# Altium PCB PCB_RXV1.PcbDoc
Units mm, origin at the board's own origin, x right, y up, seen from the top; angles counter-clockwise.
Board outline 70 x 50 mm, 2 copper layers (Top Layer, Bottom Layer); 23 components, 21 nets, 109 pads, 6 vias.
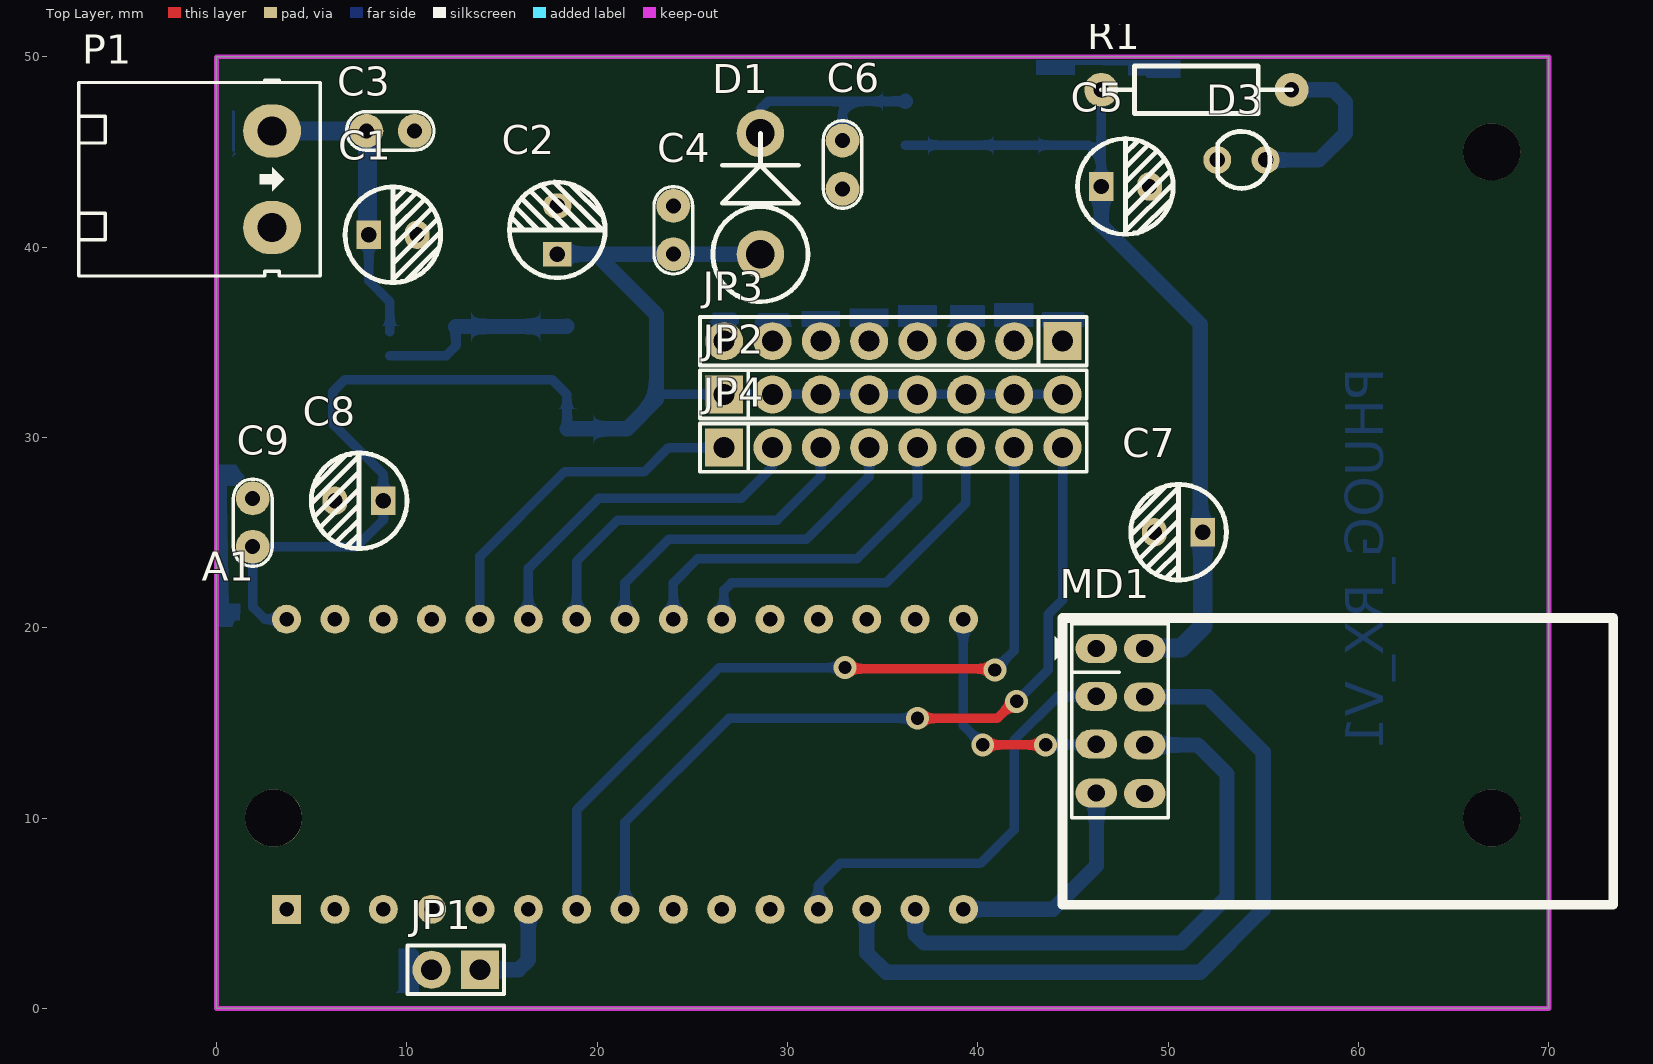
[diagram p0: Top Layer view]
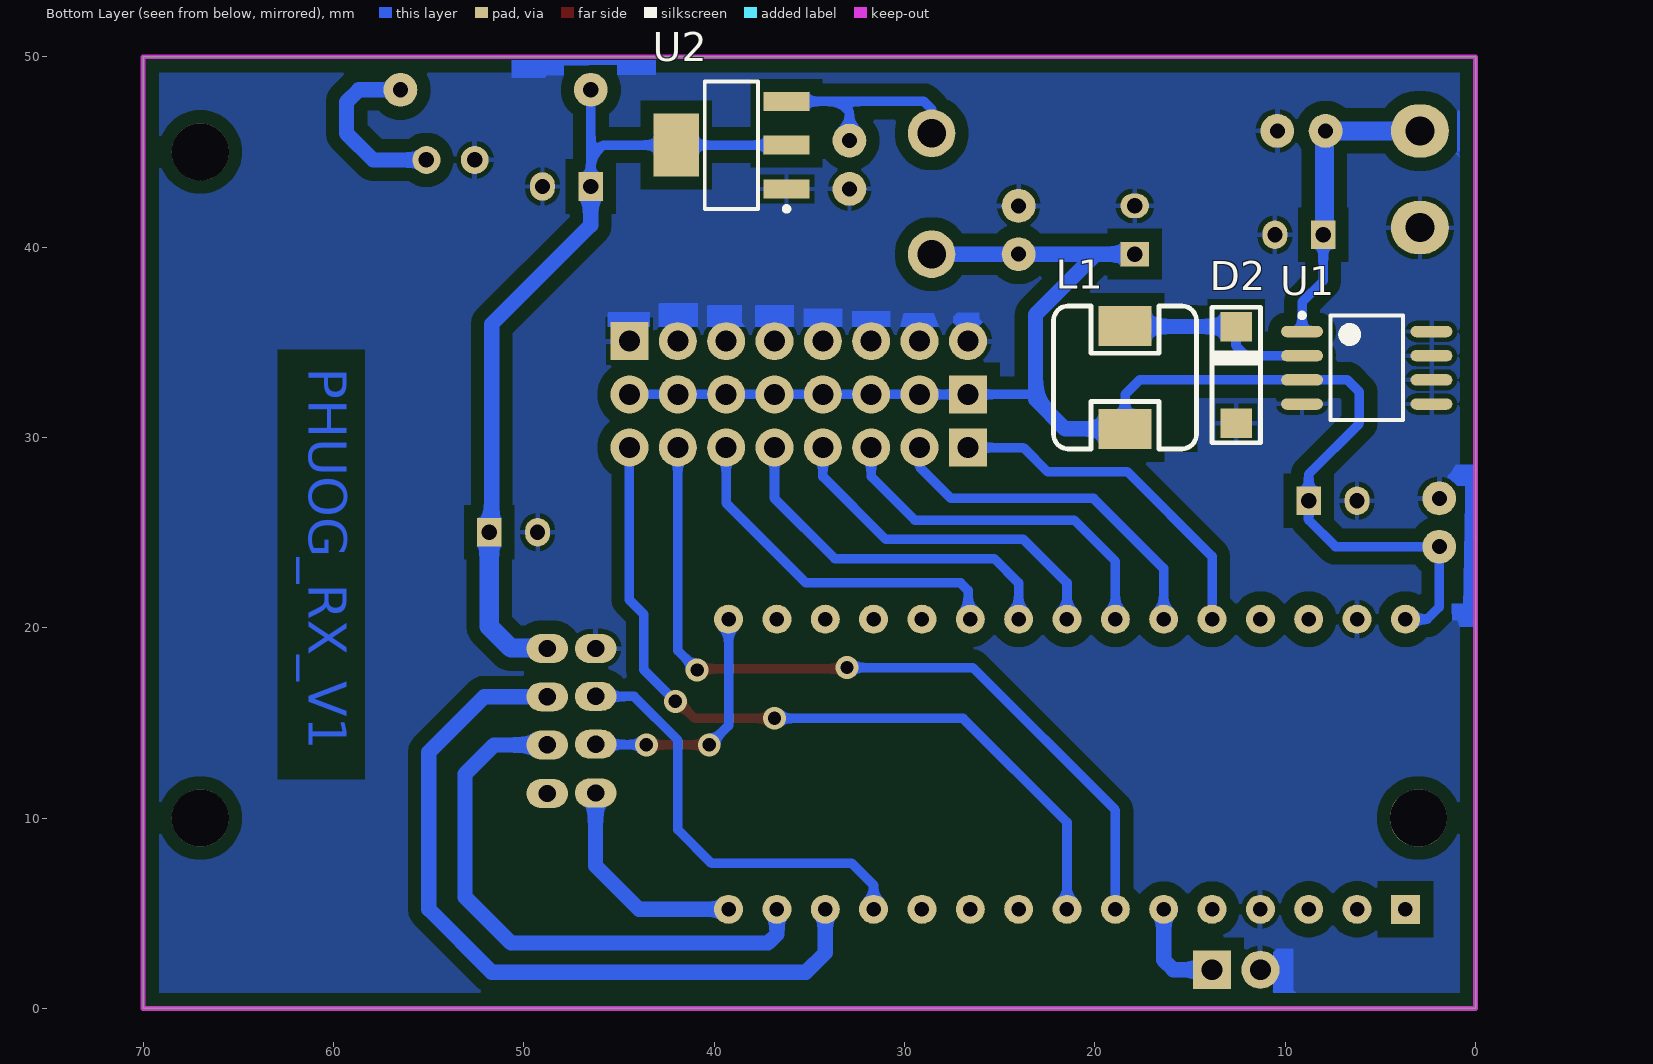
[diagram p1: Bottom Layer view, seen from below]
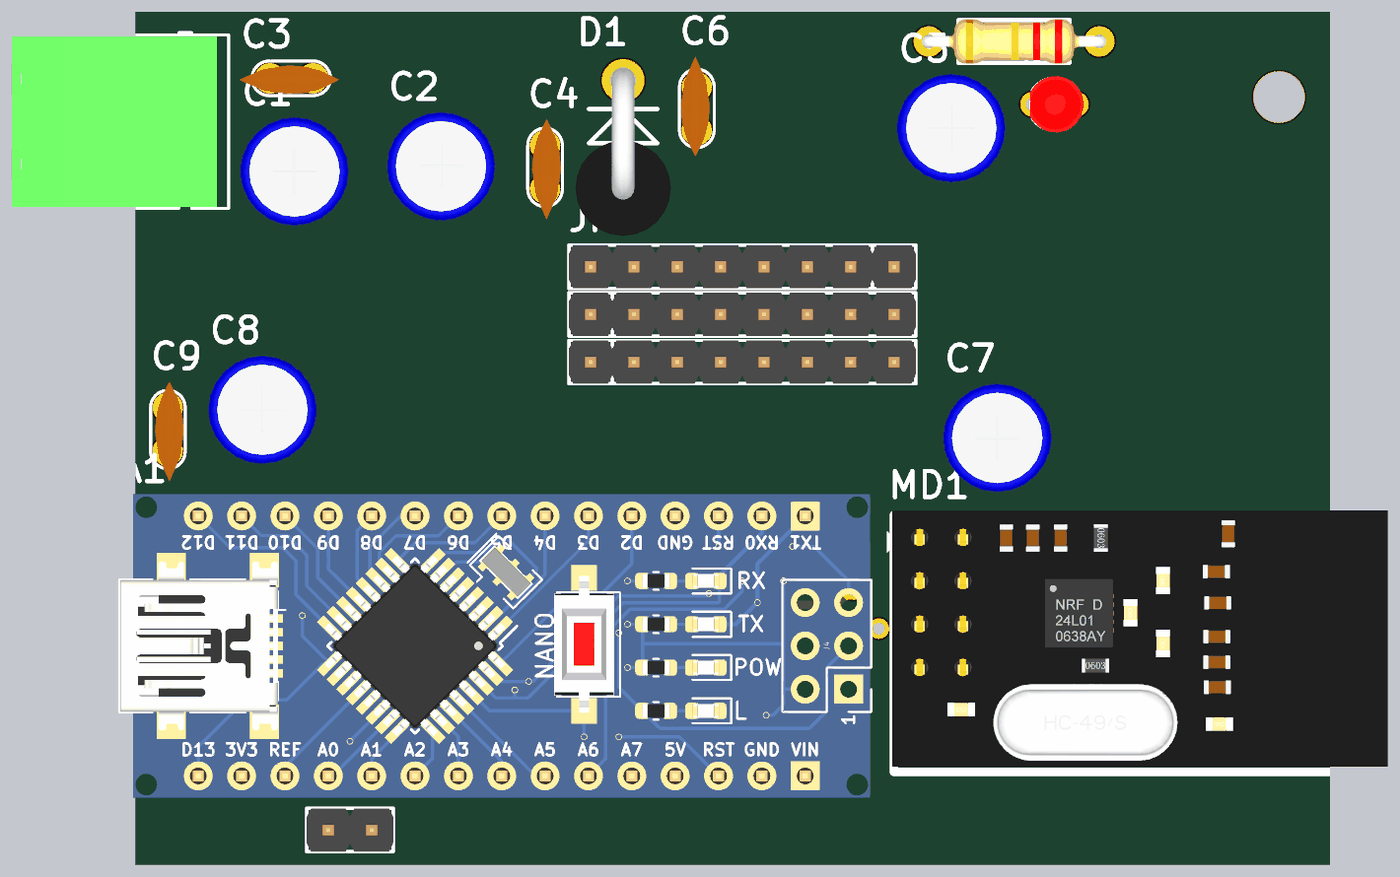
[diagram p2: 3D render of the assembled board from above, using the file's embedded part models]
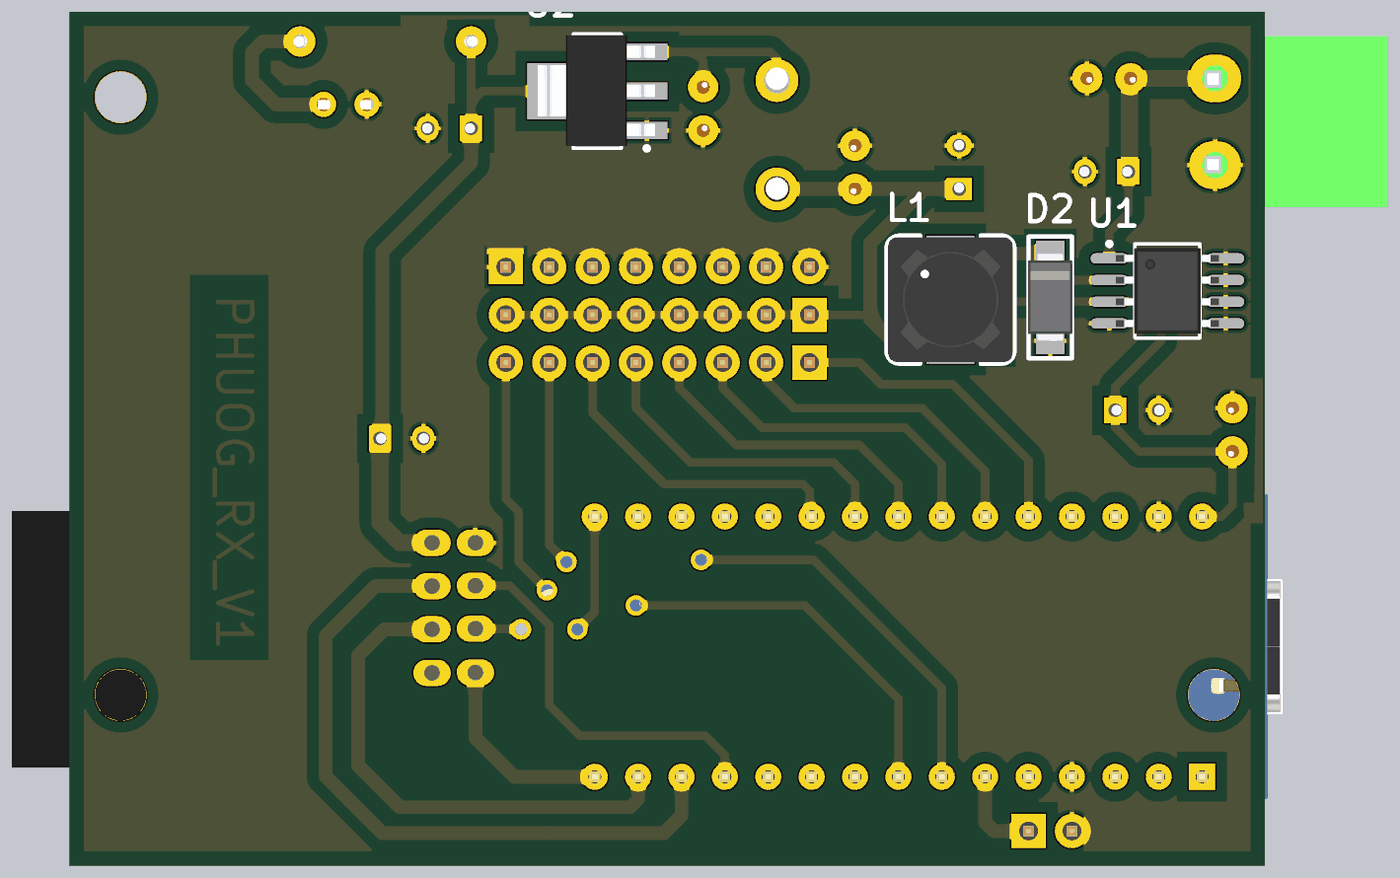
[diagram p3: 3D render of the assembled board from below, using the file's embedded part models]

## Layer stack, top to bottom
Top Solder: solder mask 0.0102, Solder Resist, Dk 3.5
Top Layer: signal copper 0.0356
Dielectric 1: dielectric 0.32, FR-4, Dk 4.8
Bottom Layer: signal copper 0.0356
Bottom Solder: solder mask 0.0102, Solder Resist, Dk 3.5

## Board outline
0,0 70,0 70,50 0,50

## Design rules (kind name [scope] priority, off if disabled: settings)
Clearance [All] p1: gap=0.7 ignorepadtopadclearanceinfootprint=FALSE
PolygonConnect [All] p1: connectstyle=Relief reliefconductorwidth=0.254 reliefentries=4 polygonreliefangle="90 Angle" airgapwidth=0.254
RoutingVias [All] p1: holewidth=0.7 width=1.2 viastyle="Through Hole" minholewidth=0.7 minwidth=1.2 maxholewidth=0.7 maxwidth=1.2
SolderMaskExpansion [All] p1: expansion=0.102 istentingtop=FALSE
Width [All] p1: maxlimit=1 minlimit=0.5 preferedwidth=0.8
30 further rules are at their usual default settings.

## Components (designator, comment, footprint, x,y, rotation, side; value= is the part's Value field where it differs from the comment)
A1 "Nano" "Arduino nano" -0.381,3.683 r0 top
C1 "100uF" "tu hoa 5mm" 9.271,40.64 r0 top
C2 "100uF" "tu hoa 5mm" 17.907,40.894 r90 top
C3 "100nF" CN1 10.414,46.101 r180 top
C4 "100nF" CN1 24.003,42.164 r270 top
C5 "100uF" "tu hoa 5mm" 47.752,43.18 r0 top
C6 "100nF" CN1 32.893,43.053 r90 top
C7 "10uF" "tu hoa 5mm" 50.546,25.019 r180 top
C8 "100uF" "tu hoa 5mm" 7.493,26.67 r180 top
C9 "100nF" CN1 1.905,26.797 r270 top
D1 "1N4007" DO-201AD-V 28.575,42.799 r270 top
D2 "SS210" DO-214AC 12.573,33.274 r90 bottom
D3 "LED" "LED-3MM RED" 53.848,44.577 r180 top value="LED 3 ly Single Colour"
JP1 "JP 1x2 2.54" "JP 1x2 DT" 13.843,2.032 r180 top
JP2 "JP 1x8 2.54" "JP 1x8 DT" 26.67,32.258 r0 top
JP3 "JP 1x8 2.54" "JP 1x8 DT" 44.45,35.052 r180 top
JP4 "JP 1x8 2.54" "JP 1x8 DT" 26.67,29.464 r0 top
L1 "220mH" "INDUCTOR SMD 7342 7.3X7.3X4.2mm" 18.415,33.147 r270 bottom value="150 mH"
MD1 "NRF24L01 Module" NRF24L01 46.228,18.91 r270 top
P1 "Header 2" HED2T 2.921,46.101 r270 top
R1 "10k" "RESISTOR 1/4W" 51.482,48.26 r0 top
U1 "XL1509" SOP8 5.715,33.655 r180 bottom
U2 "LM1117-3.3V" SOT223-4N 39.095,45.353 r0 bottom

## Footprints (in the part's own frame and the unit in brackets; to place one, negate y for a bottom-side part, rotate by r counter-clockwise, add the part's x,y. Pads: shape width x height; smd on the part's side, far side on the other; paste and mask are expansions set on the pad)
"Arduino nano" [mil] "arduino nano"
  rect 60x60 hole 30: 0(160,60)
  round 60 hole 30: 1(260,60) 2(360,60) 3(460,60) 4(560,60) 5(660,60) 6(760,60) 7(860,60) 8(960,60) 9(1060,60) 10(1160,60) 11(1260,60) 12(1360,60) 13(1460,60) 14(1560,60) 15(1560,660) 16(1460,660) 17(1360,660) 18(1260,660) 19(1160,660) 20(1060,660) 21(960,660) 22(860,660) 23(760,660) 24(660,660) 25(560,660) 26(460,660) 27(360,660) 28(260,660) 29(160,660)
  body extent -25,10 1715,710, height 507
CN1 [mil]
  round 70 hole 31: 1(0,0) 2(100,0)
  silkscreen extent -40,-40 141,40, body extent -60,-30 170,37, height 265
DO-201AD-V [mm] "Diode 5A, W 200mil, L 550mil"
  round 2.5 hole 1.5: 1(3.175,0) 2(-3.175,0)
  silkscreen extent -3.17,-2.5 5.67,2.5, body extent -3.95,-2.8 5.94,2.8, height 4.2
DO-214AC [mm]
  rect 1.55x1.65 smd: 1(-2.54,0) 2(2.54,0)
  silkscreen extent -3.56,-1.27 3.56,1.27, body extent -2.59,-1.29 2.61,1.31, height 2.4
HED2T [mil] "Header 2, 2 pin, hight 300mil, Pin to Pin 200, Colour Green"
  oval 110x120 hole 60: 1(0,0) 2(200,0)
  silkscreen extent -105,-400 300,100, body extent -97,-399 297,73, height 334
"INDUCTOR SMD 7342 7.3X7.3X4.2mm" [mm] "Inductor 7342 Body 7.3x7.3X4.2mm, Pad 2.8x2.1mm"
  rect 2.1x2.8 smd: 1(-2.7,0) 2(2.7,0)
  silkscreen extent -3.75,-3.75 3.75,3.75, body extent -3.65,-3.65 3.65,3.65, height 4.8
"JP 1x2 DT" [mm] "2 pins, 1 row, straight, gold plating"
  rect 2x2 hole 1.1: 1(0,0)
  round 2 hole 1.1: 2(2.54,0)
  silkscreen extent -1.27,-1.27 3.81,1.27, body extent -1.27,-1.27 3.81,1.27, height 8.54
"JP 1x8 DT" [mm] "8 pins, 1 row, straight, gold plating"
  rect 2x2 hole 1.1: 1(0,0)
  round 2 hole 1.1: 2(2.54,0) 3(5.08,0) 4(7.62,0) 5(10.16,0) 6(12.7,0) 7(15.24,0) 8(17.78,0)
  silkscreen extent -1.27,-1.27 19.05,1.27, body extent -1.27,-1.27 19.05,1.27, height 8.54
"LED-3MM RED" [mm]
  round 1.47 hole 0.813: 1(-1.27,0) 2(1.27,0)
  silkscreen extent -1.5,-1.5 1.25,1.5, body extent -1.71,-1.65 1.5,1.65, height 4.72
NRF24L01 [mil]
  oval 60x86 hole 36: 1(0,0) 2(0,100) 3(99,0) 4(100,100) 5(198,0) 6(199.5,100) 7(299,0) 8(300,100)
  silkscreen extent -63,-86 530,1069, body extent -73,-74 518,1068, height 588
"RESISTOR 1/4W" [mm] "R 1/4W, 2 Pin, Pitch 10mm"
  round 1.778 hole 0.8: 1(-5,0) 2(5,0)
  silkscreen extent -5,-1.25 5,1.25, body extent -5.41,-1.3 5.41,1.3, height 2.02
SOP8 [mm] "8-Pin Small Outline Package 1.27 mm Pitch, IPC Medium Density"
  oval 2.2x0.6 smd: 1(-3.4,1.905) 2(-3.4,0.635) 3(-3.4,-0.635) 4(-3.4,-1.905) 5(3.4,-1.905) 6(3.4,-0.635) 7(3.4,0.635) 8(3.4,1.905)
  silkscreen extent -3.52,-2.75 1.9,2.88, body extent -3.02,-2.51 3.02,2.51, height 1.6
SOT223-4N [mm] "SOT223, 4-Leads, Body 6.5x3.5mm, Pitch 2.3mm, Lead Span 7mm, IPC Medium Density"
  rect 2.4x1 smd: 1(-2.9,2.3) 2(-2.9,0) 3(-2.9,-2.3)
  rect 2.4x3.3 smd: 4(2.9,0)
  silkscreen extent -3.02,-3.35 1.4,3.47, body extent -3.39,-3.27 3.5,3.23, height 1.72
"tu hoa 5mm" [mm]
  rect 1.3x1.5 hole 0.8: 1(-1.27,0)
  oval 1.3x1.5 hole 0.8: 2(1.27,0)
  silkscreen extent -2.51,-2.51 2.51,2.51, body extent -3.12,-3.18 3.23,3.18, height 14.55

## Part data
A1: library part "Arduino Nano"
C1 C2 C5 C7 C8: library part "Tu Hoa 100uF 25V 6x11", "Cắm", Chung_Loai=Cắm, Don_Vi=Con, Ma_Hang=MH001351, So_Chan=2, Ten_Linh_Kien="Tụ Hóa 100uF 25V 6x11MM"
C3 C4 C6 C9: library part Cap_Non-Polar
D1: library part "Diode Standard", "Diode Standard", Part Number="LED 3 ly Single Colour"
D2: library part "Diode Schottky", "Diode Schottky", Part Number="LED 3 ly Single Colour"
D3: "LED Single"
JP1: library part "JP 1x2 2.54 Duc Thang", "Cắm", Chung_Loai=Cắm, Don_Vi=Con, Ma_Hang=MH000903, Ten_Linh_Kien="Jump Đơn Đực 2.54MM 1x40P Thẳng 11MM"
JP2 JP3 JP4: library part "JP 1x8 2.54 Duc Thang", "Cắm", Chung_Loai=Cắm, Don_Vi=Con, Ma_Hang=MH000903, Ten_Linh_Kien="Jump Đơn Đực 2.54MM 1x40P Thẳng 11MM"
L1: library part "Inductor Iron", "Magnetic-Core Inductor"
P1: "Header, 2-Pin", LatestRevisionDate=17-Jul-2002, LatestRevisionNote="Re-released for DXP Platform.", Publisher="Altium Limited"
R1: library part Resistor
U1: "IC power sop8"
U2: library part LM1117, "800mA Low-Dropout Linear Regulator", Creator="Nguyen Ba Bien", Website=http://group3i.net

## Free pads (board coordinates)
  round 3 hole 3: 2(3,10) 2(67,10) 2(67,45)

## Via types
v1: diameter 1.2, hole 0.7, Top Layer to Bottom Layer, 6 vias

## Nets (pads, with @x,y where several pads share a name; then routed paths per layer and width w, separated by ;. In a path a pad name is that pad's centre, name@x,y a point inside that pad or via, vN(x,y) a via of type N, cw(c..) or ccw(c..) an arc to the next point about the centre after c; other vN are vias at no path point)
+3.3V: C5.1 C7.1 MD1.2 R1.1 U2.2 U2.4 | length 44.5
  Bottom Layer w0.5: U2.2 U2.4 45.833,45.353 46.482,44.704 ; C5.1 46.482,44.704 ; R1.1 46.482,44.704
  Bottom Layer w0.8: C5.1 46.482,41.148 51.689,35.941 51.689,25.146 C7.1
  Bottom Layer w1: MD1.2 48.781,18.923 50.673,18.923 51.816,20.066 C7.1
+5V: A1.29 C2.1 C4.2 C8.1 C9.2 D1.1 JP2.1 JP2.2 JP2.3 JP2.4 JP2.5 JP2.6 JP2.7 JP2.8 L1.2 U1.3 | length 81.6
  Bottom Layer w0.5: A1.29 2.54,20.447 1.905,21.082 C9.2 7.366,24.257 8.763,25.654 C8.1 8.763,28.067 6.096,30.734 6.096,32.385 6.731,33.02 U1.3 17.653,33.02 18.415,32.258 L1.2 ; 23.114,32.004 23.368,32.258 JP2.1 JP2.2 JP2.3 JP2.4 JP2.5 JP2.6 JP2.7 JP2.8
  Bottom Layer w0.8: C2.1 19.939,39.624 ; L1.2 21.557,30.447 23.114,32.004 23.114,36.449 19.939,39.624 ; D1.1 C4.2 19.939,39.624
+12V: C1.1 C3.2 P1.1 U1.1 | length 16
  Bottom Layer w0.5: C1.1 8.001,38.227 9.115,37.113 U1.1
  Bottom Layer w1: P1.1 C3.2 7.938,46.038 7.938,40.703 C1.1
CE: A1.11 MD1.3 | length 22.7
  Bottom Layer w0.5: A1.11 31.623,6.477 32.766,7.62 40.132,7.62 41.91,9.398 41.91,14.097 44.209,16.396 MD1.3
CH1: A1.22 JP4.4 | length 18.8
  Bottom Layer w0.5: A1.22@21.59,20.574 A1.22 21.463,22.352 23.749,24.638 30.988,24.638 34.29,27.94 JP4.4
CH2: A1.23 JP4.3 | length 19.4
  Bottom Layer w0.5: A1.23@19.038,20.562 A1.23 18.923,23.495 21.082,25.654 29.464,25.654 31.75,27.94 JP4.3
CH3: A1.24 JP4.2 | length 18.7
  Bottom Layer w0.5: A1.24 16.383,23.114 20.066,26.797 27.559,26.797 29.21,28.448 JP4.2
CH4: A1.25 JP4.1 | length 18.5
  Bottom Layer w0.5: A1.25 13.843,23.749 18.288,28.194 22.479,28.194 23.749,29.464 JP4.1
CH5: A1.21 JP4.5 | length 19.2
  Bottom Layer w0.5: A1.21 24.003,22.352 25.273,23.622 33.655,23.622 36.83,26.797 JP4.5
CH6: A1.20 JP4.6 | length 19.1
  Bottom Layer w0.5: A1.20 26.658,20.562 26.658,21.959 27.051,22.352 35.179,22.352 39.37,26.543 JP4.6
CH7: A1.6 JP4.7 | length 42.4
  Top Layer w0.5: v1(33.02,17.907) 33.084,17.843 40.831,17.843 v1(40.894,17.78)
  Bottom Layer w0.5: A1.6 18.923,10.414 26.416,17.907 v1(33.02,17.907) ; v1(40.894,17.78) 41.91,18.796 JP4.7
CH8: A1.7 JP4.8 | length 42.1
  Top Layer w0.5: v1(36.83,15.24) 41.017,15.24 41.906,16.129 v1(42.037,16.129)
  Bottom Layer w0.5: A1.7 21.463,9.779 26.924,15.24 v1(36.83,15.24) ; v1(42.037,16.129) 43.688,17.78 43.688,20.701 44.45,21.463 JP4.8
CSN: A1.12 MD1.4 | length 40.6
  Bottom Layer w0.8: A1.12 34.163,2.921 35.179,1.905 51.689,1.905 54.991,5.207 54.991,13.462 52.083,16.37 MD1.4
GND: A1.3 A1.28 C1.2 C2.2 C3.1 C4.1 C5.2 C6.1 C7.2 C8.2 C9.1 D2.1 D3.2 JP1.2 JP3.1 JP3.2 JP3.3 JP3.4 JP3.5 JP3.6 JP3.7 JP3.8 MD1.1 P1.2 U1.4 U1.5 U1.6 U1.7 U1.8 U2.1
MISO: A1.14 MD1.7 | length 11.8
  Bottom Layer w0.8: A1.14 43.942,5.207 46.228,7.493 MD1.7
MOSI: A1.13 MD1.6 | length 30.3
  Bottom Layer w0.8: A1.13 36.703,3.898 37.172,3.429 50.673,3.429 53.086,5.842 53.086,12.319 51.562,13.843 MD1.6
NetC6_2: C6.2 D1.2 U2.3 | length 11.4
  Bottom Layer w0.5: D1.2 28.575,47.244 28.984,47.653 33.429,47.653 ; C6.2 32.893,47.117 33.429,47.653 ; U2.3 33.429,47.653
  Bottom Layer w0.8: C6.2 C6.2@32.9,45.6 ; U2.3@36.188,47.646 U2.3
NetD2_2: D2.2 L1.1 U1.2 | length 10.5
  Bottom Layer w0.5: U1.2 12.065,34.29 12.573,34.798 D2.2
  Bottom Layer w0.8: D2.2 12.589,35.83 18.399,35.83 L1.1
NetD3_1: D3.1 R1.2 | length 9.5
  Bottom Layer w0.8: D3.1 57.912,44.577 59.309,45.974 59.309,47.625 58.674,48.26 R1.2
PIN: A1.5 JP1.1 | length 5.4
  Bottom Layer w0.8: JP1.1 15.875,2.032 16.383,2.54 A1.5
SCK: A1.15 MD1.5 | length 13.1
  Top Layer w0.5: v1(40.259,13.843) v1(43.561,13.843)
  Bottom Layer w0.5: A1.15 39.243,14.859 v1(40.259,13.843) ; v1(43.561,13.843) 43.58,13.862 46.209,13.862 MD1.5
  Bottom Layer w0.8: MD1.5@46.139,13.97 MD1.5
pads on no net: A1.0 A1.1 A1.2 A1.4 A1.8 A1.9 A1.10 A1.16 A1.17 A1.18 A1.19 A1.26 A1.27 MD1.8

## Polygon pours and split planes (outlines as drawn)
GND on Bottom Layer "GND_L02_P000" (solid, remove dead copper, pour order 0): 0,49.911 69.977,49.911 69.977,0 0,0

## Keep-outs
Keep-Out Layer:
  the board outline again, w0.254

## Other copper
Bottom Layer:
  region net GND: 48.844,49.809 50.622,49.809 50.622,48.895 48.902,48.895 48.784,49.013
  region net GND: 44.602,49.809 43.078,49.809 43.078,49.047 43.085,49.054 44.647,49.054
  region net GND: 1.041,28.55 0.127,28.55 0.127,28.169 1.27,28.169
  region net GND: 0.838,20.041 0.127,20.041 0.127,20.447 0.152,20.422 0.965,20.422
  region net GND: 48.844,49.809 48.844,49.073 48.784,49.013 47.89,49.013 47.89,49.798 47.879,49.809
  region net GND: 45.06,49.809 44.602,49.809 44.602,49.098 44.647,49.054 45.101,49.054 45.101,49.768
  region net GND: 45.041,49.577 45.041,49.777 45.06,49.809 48.133,49.809 48.133,49.535
  region net GND: 0.523,28.169 1.27,28.169 1.464,27.975 1.464,27.862 1.375,27.862 0.961,27.448 0.952,27.457 0.533,27.457
  region net GND: 0.635,21.26 1.245,21.26 1.245,20.724 1.227,20.707 0.961,20.973 0.646,20.973
  region net GND: 0.134,20.973 0.134,20.454 0.127,20.447 0.17,20.404 1.227,20.404 1.227,20.707 0.961,20.973
  region net GND: 0.646,20.973 0.134,20.973 0.127,28.169 0.523,28.169
  region net GND: 10.616,2.953 10.616,0.834 9.453,0.834 9.449,0.838 9.576,0.965 9.576,3.124 10.444,3.124
  region net GND: 43.383,35.814 45.593,35.814 45.593,36.525 45.542,36.576 43.383,36.576
  region net GND: 40.907,35.822 42.913,35.822 42.913,36.995 42.85,37.059 40.869,37.059 40.869,35.86
  region net GND: 38.367,35.822 40.373,35.822 40.373,36.843 40.386,36.855 40.31,36.932 38.557,36.932 38.557,36.013
  region net GND: 35.827,35.822 37.833,35.822 37.833,36.894 37.846,36.906 37.821,36.932 35.814,36.932 35.814,35.835
  region net GND: 33.287,35.822 35.293,35.822 35.293,36.741 35.306,36.754 33.274,36.754 33.274,35.835
  region net GND: 30.747,35.822 32.753,35.822 32.753,36.589 32.766,36.601 32.741,36.627 30.759,36.627 30.759,35.835
  region net GND: 30.048,36.525 30.213,35.814 29.794,35.814 28.207,35.814 28.473,36.525
  region net GND: 25.9,36.055 26.111,35.844 26.111,35.839 27.254,35.839 27.44,36.025 27.44,36.339 27.229,36.551 26.086,36.551 26.086,36.241
  region net GND: 0.961,45.082 0.961,47.12 0.929,47.152 0.834,47.152 0.834,45.05 0.954,44.93 1.039,44.93 0.838,44.729
  pour cut-out: 14.605,36.957 22.352,36.957 22.352,29.21 14.605,29.21
  text "PHUOG_RX_V1" at 61.309,33.655 h2 r90